# Altium PCB Kicker.PcbDoc (part 1 of 2)
Units mil, origin at the board's own origin, x right, y up, seen from the top; angles counter-clockwise.
Board outline 3322.83 x 1346.46 mil, 2 copper layers (Top Layer, Bottom Layer), stack 30.748 mil thick; 41 components, 31 nets, 116 pads, 28 vias.
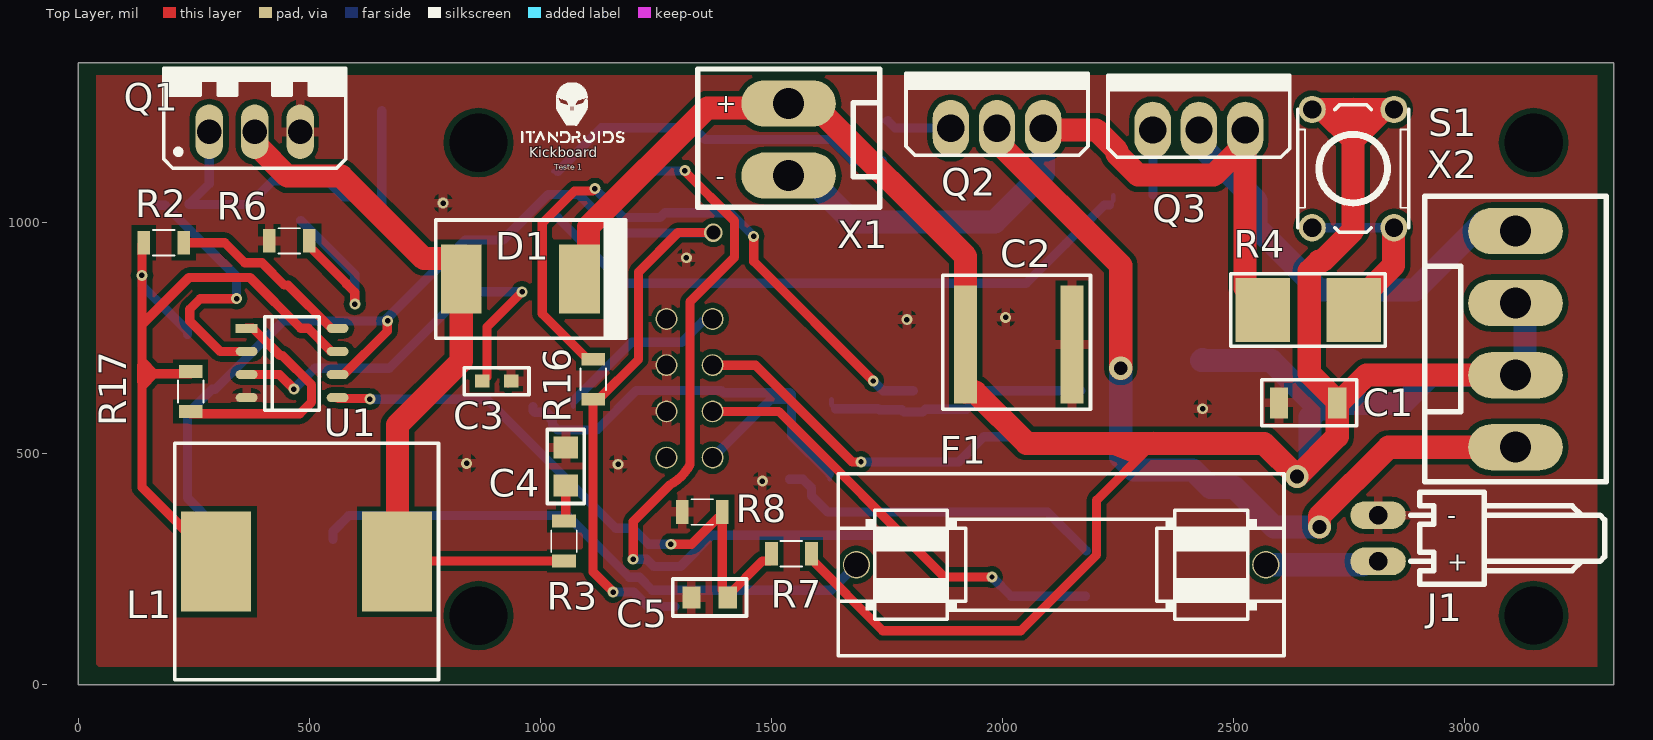
[diagram p0: Top Layer view]
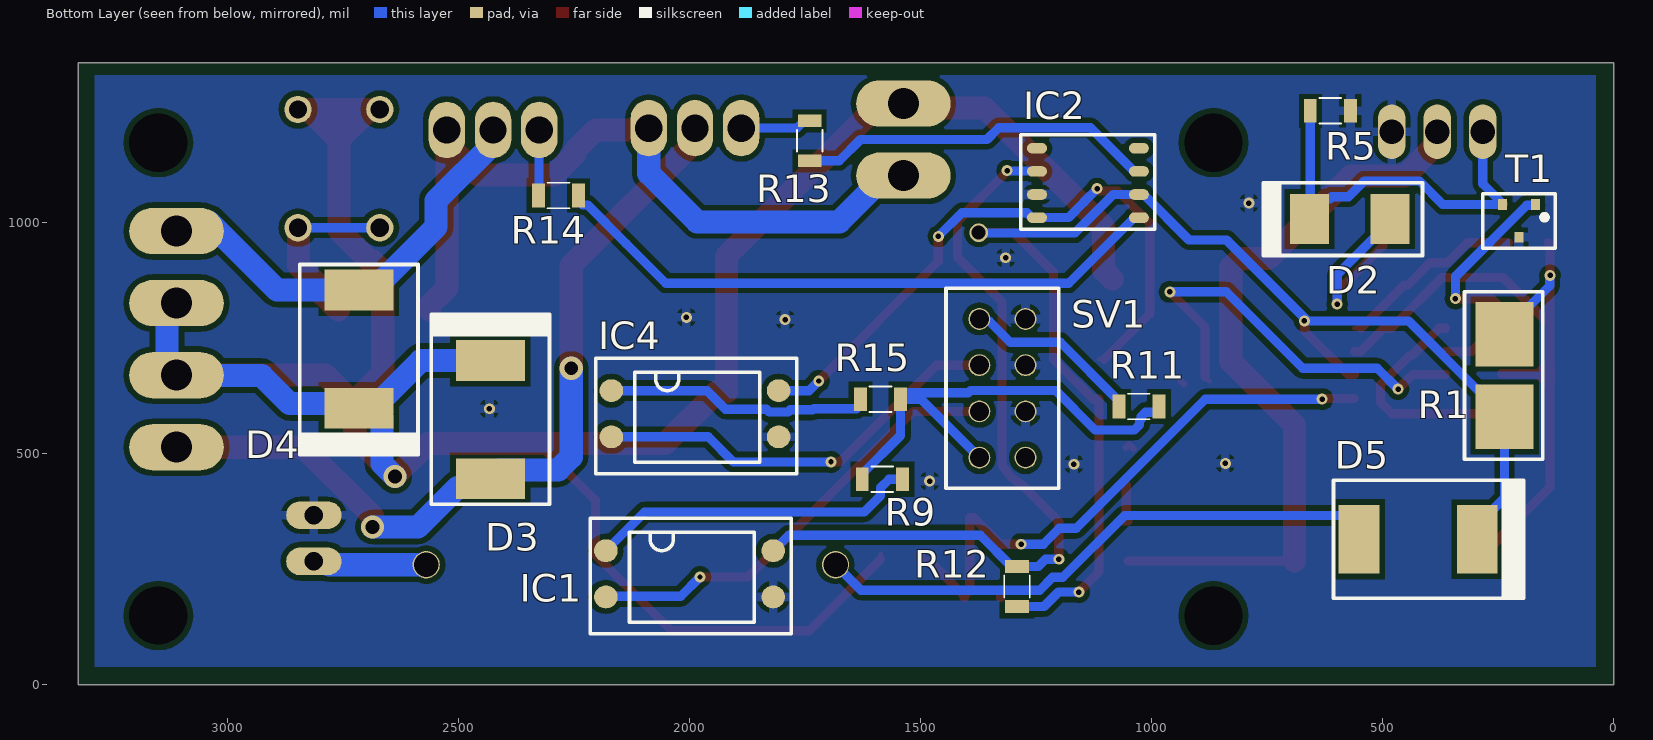
[diagram p1: Bottom Layer view, seen from below]
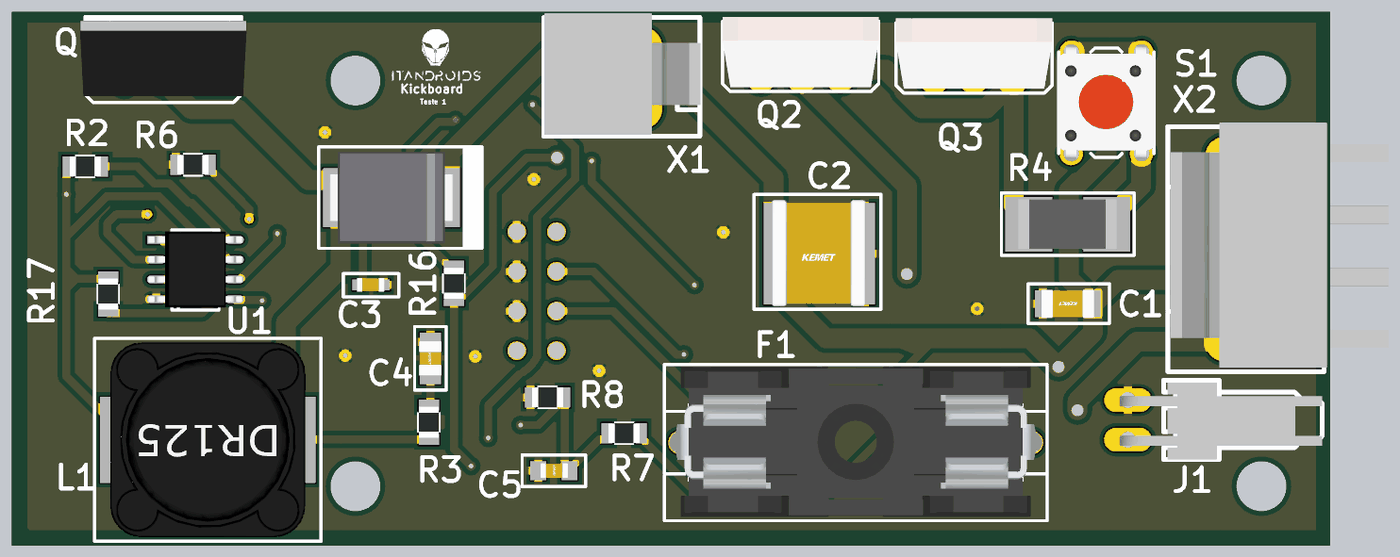
[diagram p2: 3D render of the assembled board from above, using the file's embedded part models]
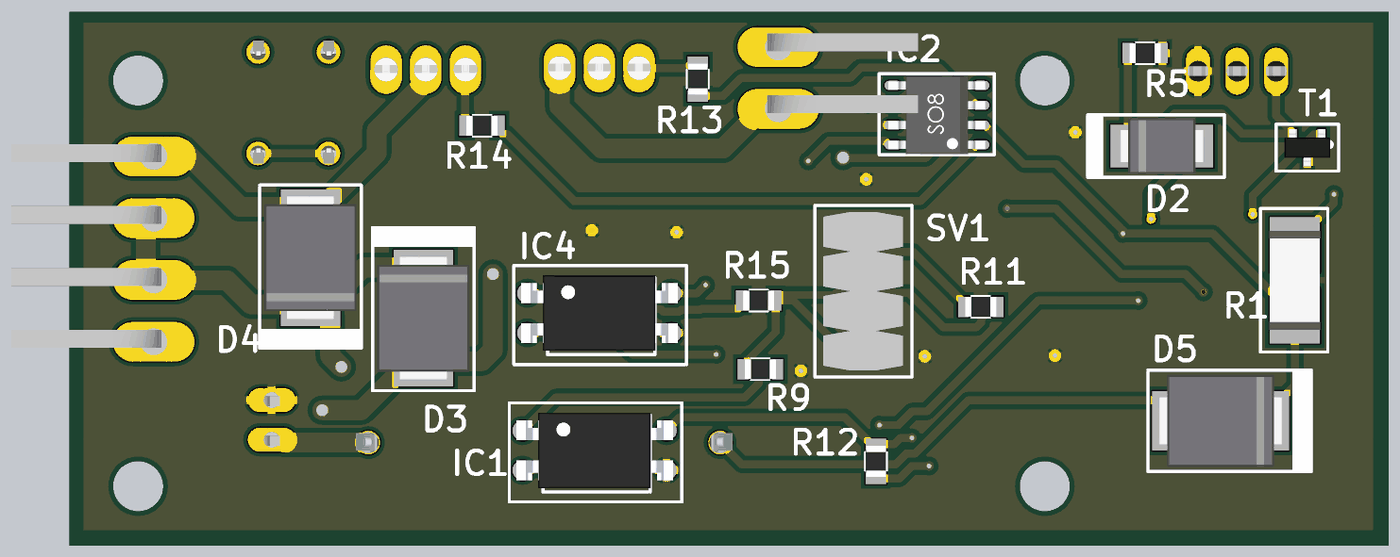
[diagram p3: 3D render of the assembled board from below, using the file's embedded part models]

## Layer stack, top to bottom
Top Solder: solder mask 0.4, Solder Resist, Dk 3.5
Top Layer: signal copper 1.378
Dieletric 1: prepreg 27.9921, PP-006, Dk 4.1
Bottom Layer: signal copper 1.378
Bottom Solder: solder mask 0.4, Solder Resist, Dk 3.5

## Board outline
0,0 0,1346.46 3322.83,1346.46 3322.83,0

## Design rules (kind name [scope] priority, off if disabled: settings)
Clearance [All] p1: gap=11.81 ignorepadtopadclearanceinfootprint=FALSE
DiffPairsRouting [All] p1: maxlimit=10 minlimit=10 mostfreqgap=10 substack1={F6E0959F-35FE-4660-A06D-27E5D69F85E3} toplayer_{f6e0959f-35fe-4660-a06d-27e5d69f85e3}_minwidth=15 toplayer_{f6e0959f-35fe-4660-a06d-27e5d69f85e3}_maxwidth=15 toplayer_{f6e0959f-35fe-4660-a06d-27e5d69f85e3}_prefwidth=15 bottomlayer_{f6e0959f-35fe-4660-a06d-27e5d69f85e3}_minwidth=15 bottomlayer_{f6e0959f-35fe-4660-a06d-27e5d69f85e3}_maxwidth=15 bottomlayer_{f6e0959f-35fe-4660-a06d-27e5d69f85e3}_prefwidth=15 toplayer_minwidth=15 toplayer_maxwidth=15 toplayer_prefwidth=15 bottomlayer_minwidth=15 bottomlayer_maxwidth=15 bottomlayer_prefwidth=15 substack2={2711AD71-F103-4CAD-93B6-FAE1FBF85523} toplayer_{2711ad71-f103-4cad-93b6-fae1fbf85523}_minwidth=15 toplayer_{2711ad71-f103-4cad-93b6-fae1fbf85523}_maxwidth=15 toplayer_{2711ad71-f103-4cad-93b6-fae1fbf85523}_prefwidth=15 bottomlayer_{2711ad71-f103-4cad-93b6-fae1fbf85523}_minwidth=15 bottomlayer_{2711ad71-f103-4cad-93b6-fae1fbf85523}_maxwidth=15 bottomlayer_{2711ad71-f103-4cad-93b6-fae1fbf85523}_prefwidth=15 maxuncoupledlength=500
PolygonConnect [All] p1: connectstyle=Relief reliefconductorwidth=20 reliefentries=4 polygonreliefangle="90 Angle" airgapwidth=10
RoomDefinition Sheet2 [InComponentClass('Sheet2')] p1 off: confinementstyle=ConfineIn formatcopy=TRUE lockcomponents=FALSE outline 3515.75,929.13 9535.75,929.13 9535.75,2019.13 3515.75,2019.13
RoomDefinition Sheet1 [InComponentClass('Sheet1')] p2 off: confinementstyle=ConfineIn formatcopy=TRUE lockcomponents=FALSE outline 3535.43,74.8 8335.43,74.8 8335.43,819.8 3535.43,819.8
RoutingVias [All] p1: holewidth=11.81 width=23.62 viastyle="Through Hole" minholewidth=11.81 minwidth=23.62 maxholewidth=11.81 maxwidth=23.62
SolderMaskExpansion [All] p1: expansion=4 istentingtop=FALSE
Width [All] p1: maxlimit=50 minlimit=10 preferedwidth=20 substack1={F6E0959F-35FE-4660-A06D-27E5D69F85E3} substack2={2711AD71-F103-4CAD-93B6-FAE1FBF85523}
29 further rules are at their usual default settings.

## Classes and differential pairs
component class Sheet2: C1 C2 C3 C4 C5 D1 D2 D5 F1 J1 L1 Q1 R1 R2 R3 R4 R5 R6 R7 R8 R17 S1 T1 U1
component class Sheet1: D3 D4 IC1 IC2 IC4 Q2 Q3 R9 R11 R12 R13 R14 R15 R16 SV1 X1 X2

## Components (designator, comment, footprint, x,y, rotation, side; value= is the part's Value field where it differs from the comment)
C1 "Cap_Cer_0.1u_250V_1206" CAP_CER_0.1U_250V_1206 2661.42,610.24 r180 top
C2 "Cap_Cer_1u_200V_2225" Cap_Cer_1u_200V_2225 2035.43,736.22 r0 top
C3 "Cap_Cer_1n_50V_0603" "Cap_Cer 1n_50V_0603" 905.51,657.48 r0 top
C4 "Cap_Cer_10nF_250V_0805" CAP_CER_10N_250V_0805 1055.12,472.44 r90 top
C5 "Cap_Cer_10n_50V_0603" Cap_Cer_10n_50V_0603 1366.14,188.98 r180 top
D1 "Diode_200V_3A_DO-214AB" D320 956.69,877.95 r180 top
D2 "Diode_30V_2A_DO_214AA" D130 571.26,1007.87 r180 bottom
D3 "Diode_200V_3A_DO-214AB" D320 2431.1,573.82 r270 bottom
D4 "Diode_200V_3A_DO-214AB" D320 2715.55,726.38 r90 bottom
D5 "Diode_200V_3A_DO-214AB" D320 423.23,314.96 r0 bottom
F1 "Fuseholder(Cartridge)" FuseHolder 2126.97,259.84 r0 top
IC1 "HCPL-817-300E" OPTOISOLATOR_5KV_TRANSISTOR_4SMD 2000,240.16 r180 bottom
IC2 "TC4426AEOA713" "CI DRIVER" 1248.03,1161.02 r180 bottom
IC4 "HCPL-817-300E" OPTOISOLATOR_5KV_TRANSISTOR_4SMD 1988.19,586.61 r180 bottom
J1 "CONN HEADER" "CONN HEADER R_A 2POS 2.54MM" 2812.99,367.16 r0 top
L1 "Ind_DR125_47uH_2A" DR125 494.09,266.73 r180 top
Q1 "IRF740APBF" To-220 381.89,1196.85 r0 top
Q2 "IRFSL4127PBF" TO-262 1988.19,1204.72 r0 top
Q3 "IRFSL4127PBF" TO-262 2425.2,1200.79 r0 top
R1 "RES_0.15R_2W_2512" R2512 236.22,669.29 r270 bottom
R2 "Res_47R_0805" 0805 185.04,956.69 r180 top
R3 "1k" Resistor_0805 1051.18,314.96 r270 top value=RC0805FR-071KL
R4 "3.3K OHMS 2512" RESISTOR_2512 2661.42,811.02 r180 top
R5 "1k" Resistor_0805 609.25,1242.12 r0 bottom value=RC0805FR-071KL
R6 "1k" Resistor_0805 452.76,960.63 r0 top value=RC0805FR-071KL
R7 "150 K" Resistor_0805 1547.24,283.46 r180 top value=RC0805FR-07220KL
R8 "Res_1.2K_0805_1%" 0805 1350.39,374.02 r0 top
R9 "390R" Resistor_0805 1578.74,444.88 r0 bottom value=1K
R11 "Res_1.2K_0805_1%" 0805 1027.56,602.36 r180 bottom
R12 "Res_1.2K_0805_1%" 0805 1291.34,212.6 r270 bottom
R13 "1k" Resistor_0805 1740.16,1173.23 r90 bottom value=RC0805FR-071KL
R14 "1k" Resistor_0805 2287.4,1059.06 r180 bottom value=RC0805FR-071KL
R15 "390R" Resistor_0805 1590.55,618.11 r180 bottom value=1K
R16 "Res_1.2K_0805_1%" 0805 1114.17,661.42 r270 top
R17 "1k" Resistor_0805 243.11,630.91 r90 top value=RC0805FR-071KL
S1 "B3F-1005" SWITCH_TACTILE_SPST-NO_0.05A_24V 2847.44,1245.08 r270 top
SV1 "90131-0764" "CONN HEADER VERT 8POS 2.54MM" 1322.83,641.73 r0 bottom
T1 "MMBT3906-7-F" SOT-23-3 204.99,1003.94 r0 bottom
U1 "MC34063EBD-TR" MC34063EBD-TR 364.33,771.46 r0 top
X1 "CONN HEADER" "CONN HEADER R_A 2POS 3.98MM" 1537.28,1179.88 r0 top
X2 "CONN HEADER" "CONN HEADER R_A 4POS 3.98MM" 3110.24,748.03 r0 top

## Footprints (in the part's own frame and the unit in brackets; to place one, negate y for a bottom-side part, rotate by r counter-clockwise, add the part's x,y. Pads: shape width x height; smd on the part's side, far side on the other; paste and mask are expansions set on the pad)
0805 [mm]
  rect 0.7x1.3 smd: 1(-1.1,0) 2(1.1,0)
  silkscreen extent -0.6,-0.7 0.6,0.7, body extent -1,-0.62 1,0.63, height 0.5
"Cap_Cer 1n_50V_0603" [mm]
  rect 0.8x0.7 smd: 1(-0.8,0) 2(0.8,0)
  silkscreen extent -1.78,-0.76 1.78,0.72, body extent -0.9,-0.42 0.85,0.45, height 1
CAP_CER_0.1U_250V_1206 [mm]
  rect 1x1.7 smd: 1(-1.6,0) 2(1.6,0)
  silkscreen extent -2.67,-1.27 2.54,1.27, body extent -1.7,-0.89 1.7,0.91, height 1.4
Cap_Cer_1u_200V_2225 [mil]
  rect 50x255.91 smd: 1(-115,0) 2(115,0)
  silkscreen extent -165,-140 155,150, body extent -120,-132 116,136, height 71
Cap_Cer_10n_50V_0603 [mm]
  rect 1x1.2 smd: 1(-1,0) 2(1,0)
  silkscreen extent -2.03,-1.02 2.03,1.02, body extent -0.9,-0.48 0.85,0.47, height 0.87
CAP_CER_10N_250V_0805 [mm]
  rect 1.2x1.35 smd: 1(-1.05,0) 2(1.05,0)
  silkscreen extent -2.03,-1.02 2.03,1.02, body extent -1.1,-0.72 1.1,0.73, height 0.95
"CI DRIVER" [mm]
  oval 1.1x0.584 smd: 1(0,0) 2(0,-1.27) 3(0,-2.54) 4(0,-3.81) 5(5.6,-3.81) 6(5.6,-2.54) 7(5.6,-1.27) 8(5.6,0)
  silkscreen extent -0.9,-4.45 6.48,0.75, body extent -0.31,-4.41 5.89,0.6, height 1.75
"CONN HEADER R_A 2POS 2.54MM" [mil] "Conn Wire to Board HDR 2 POS 2.54mm Solder RA Thru-Hole Bag"
  oval 120x60 hole 40.16: 1(0,0) 2(0,-100)
  silkscreen extent 70,-150 490,50, body extent -20,-150 489,44, height 263
"CONN HEADER R_A 2POS 3.98MM" [mm] "Connector Header Through Hole, Right Angle 2 position 0.156\" (3.96mm)"
  oval 5.2x2.54 hole 1.7: 1(0,1.98) 2(0,-1.98)
  silkscreen extent -5,-3.73 5,3.88, body extent -8.93,-3.63 5.04,4.14, height 15
"CONN HEADER R_A 4POS 3.98MM" [mm] "Connector Header Through Hole, Right Angle 4 position 0.156\" (3.96mm)"
  oval 5.2x2.54 hole 1.7: 1(0,-5.94) 2(0,-1.98) 3(0,1.98) 4(0,5.94)
  silkscreen extent -5,-7.85 5,7.85, body extent -4.82,-7.6 9.15,8.1, height 14.8
"CONN HEADER VERT 8POS 2.54MM" [mm]
  round 1.2 hole 1.05: 1(-1.27,3.81) 2(1.27,3.81) 3(-1.27,1.27) 4(1.27,1.27) 5(-1.27,-1.27) 6(1.27,-1.27) 7(-1.27,-3.81) 8(1.27,-3.81)
  silkscreen extent -3.1,-5.5 3.1,5.5, body extent -2.51,-5.08 2.57,5.08, height 5.4
D130 [mil]
  rect 85x107.99 smd: 1(-87.01,0) 2(87.01,0)
  silkscreen extent -187,-79 157,79, body extent -106,-71 106,71, height 91
D320 [mm]
  rect 2.25x3.79 smd: 1(-3.25,0) 2(3.25,0)
  silkscreen extent -5.8,-3.25 4.65,3.25, body extent -3.98,-2.95 3.97,2.95, height 2.32
DR125 [mm]
  rect 3.85x5.5 smd: 1(-4.975,0) 2(4.975,0)
  silkscreen extent -7.25,-6.5 7.25,6.5, body extent -6.25,-6.25 6.25,6.25, height 8.01
FuseHolder [mm]
  round 1.5 hole 1.35: 1(-11.25,0) 2(11.25,0)
  silkscreen extent -12.25,-5 12.25,5, body extent -12.05,-4.75 12.05,4.85, height 11.8
MC34063EBD-TR [mm]
  rect 1.2x0.5 smd: 1(0,0)
  oval 1.2x0.5 smd: 2(0,-1.27) 3(0,-2.54) 4(0,-3.81) 5(5,-3.81) 6(5,-2.54) 7(5,-1.27) 8(5,0)
  silkscreen extent 1,-4.5 4,0.64, body extent -0.5,-4.35 5.5,0.55, height 1.53
OPTOISOLATOR_5KV_TRANSISTOR_4SMD [mm]
  oval 1.3x1.25 smd: 1(-4.6,1.27) 2(-4.6,-1.27) 3(4.6,1.27) 4(4.6,-1.27)
  silkscreen extent -5.46,-3.3 5.59,3.05, body extent -5.01,-2.42 5.02,2.42, height 3.9
R2512 [mm]
  rect 3.55x3.2 smd: 1(-2.275,0) 2(2.275,0)
  silkscreen extent -4.6,-2.2 4.6,2.1, body extent -3.17,-1.63 3.18,1.63, height 0.58
Resistor_0805 [mm]
  rect 0.7x1.3 smd: 1(-1,0) 2(1.2,0)
  silkscreen extent -0.5,-0.7 0.7,0.7, body extent -0.9,-0.63 1.1,0.63, height 0.5
RESISTOR_2512 [mm]
  rect 3x3.5 smd: 1(-2.5,0) 2(2.5,0)
  silkscreen extent -4.25,-2 4.25,2, body extent -3.13,-1.6 3.17,1.6, height 0.59
SOT-23-3 [mm]
  rect 0.5x0.6 smd: B(-0.9,-0.9) C(0,0.9) E(0.9,-0.9)
  silkscreen extent -2,-1.5 2,1.5, body extent -1.46,-1.18 1.46,1.16, height 1.07
SWITCH_TACTILE_SPST-NO_0.05A_24V [mm]
  round 1.5 hole 1: 1(0,0) 2(0,-4.5) 3(6.5,0) 4(6.5,-4.5)
  silkscreen extent -0.25,-5.3 6.75,0.8, body extent -0.75,-5.38 7.15,0.83, height 7
To-220 [mm]
  oval 1.524x3 hole 1.33: D(0,0) G(-2.5,0) S(2.5,0)
  silkscreen extent -5,-2 5,3.5, body extent -5.33,-1.61 5.34,3.22, height 22.66
TO-262 [mm]
  oval 2x3.1 hole 1.5: D(0,0) G(-2.54,0) S(2.54,0)
  silkscreen extent -5,-1.5 5,3, body extent -5,-1.22 5,3.29, height 15.15

## Part data
C1: "KEMET - C1206C104KARACTU - CAP, 0.1µF, 250V, 10%, X7R, 1206", Capacitance=100nF, Case Code (Imperial)=1206, Case Code (Metric)=3216, Dielectric=X7R, Dielectric Material=Ceramic, Manufacturer=KEMET, Manufacturer Part Number=C1206C104KARACTU, Max Operating Temperature=125°C, Min Operating Temperature=-55°C, Package Quantity=2500, Tolerance=10%, Voltage=250V, Case/Package=1206, Category="Ceramic Capacitors", ComponentLink1Description=https://datasheet.ciiva.com/146/kem-c1002-x7r-smd-146896.pdf?src-supplier=Digi-Key, ComponentLink1URL=https://datasheet.ciiva.com/146/kem-c1002-x7r-smd-146896.pdf?src-supplier=Digi-Key, ComponentLink2Description=https://datasheet.ciiva.com/146/kem-c1002-x7r-smd-146897.pdf?src-supplier=Digi-Key, ComponentLink2URL=https://datasheet.ciiva.com/146/kem-c1002-x7r-smd-146897.pdf?src-supplier=Digi-Key, ComponentLink3Description=https://datasheet.ciiva.com/146/kem-c1002-x7r-smd-146898.pdf?src-supplier=Digi-Key, ComponentLink3URL=https://datasheet.ciiva.com/146/kem-c1002-x7r-smd-146898.pdf?src-supplier=Digi-Key, ComponentLink4Description=https://datasheet.ciiva.com/28533/1918693-28533237.pdf?src-supplier=Element14, ComponentLink4URL=https://datasheet.ciiva.com/28533/1918693-28533237.pdf?src-supplier=Element14, ComponentLink5Description=https://datasheet.ciiva.com/14588/70096117-14588278.pdf?src-supplier=Allied+Electronics, ComponentLink5URL=https://datasheet.ciiva.com/14588/70096117-14588278.pdf?src-supplier=Allied+Electronics, ComponentLink6Description=https://datasheet.ciiva.com/6094/kem-c1002-x7r-smd-6094138.pdf?src-supplier=Farnell, ComponentLink6URL=https://datasheet.ciiva.com/6094/kem-c1002-x7r-smd-6094138.pdf?src-supplier=Farnell, Contact Plating=Tin,Matte, Depth=1.6mm, Dissipation Factor=2.5%, Height=1.25mm, Length=3.2mm, Mount="Surface Mount,PCB", Number of Pins=2, Packaging="Tape and Reel", Pricing 1="1=0,40000, 10=0,27700, 100=0,16620, 500=0,12466, 1000=0,10527 (USD)", Radiation Hardening=No, REACH SVHC="No SVHC", RoHS=Yes, Stock 1=71903, Supplier 1=Digi-Key, Termination=SMD/SMT, Thickness=0.055inch, Voltage Rating=250V, Voltage Rating (DC)=250V, Width=0.063inch
C2: "CAP CER 1UF 200V X7R 2225", Capacitance=1uF, Case Code (Imperial)=2225, Case Code (Metric)=5763, Dielectric=X7R, Manufacturer="Vishay Vitramon", Manufacturer Part Number=VJ2225Y105KXCAT, Max Operating Temperature=125°C, Min Operating Temperature=-55°C, Package Quantity=1, Tolerance=10%, Voltage Rating=200V, Case/Package=2225, Category="Ceramic Capacitors", ComponentLink1Description=https://datasheet.ciiva.com/149/vjcommercialseries-149648.pdf?src-supplier=Digi-Key, ComponentLink1URL=https://datasheet.ciiva.com/149/vjcommercialseries-149648.pdf?src-supplier=Digi-Key, ComponentLink2Description=https://datasheet.ciiva.com/149/vjcommercialseries-149649.pdf?src-supplier=Digi-Key, ComponentLink2URL=https://datasheet.ciiva.com/149/vjcommercialseries-149649.pdf?src-supplier=Digi-Key, ComponentLink3Description=https://datasheet.ciiva.com/15165/getdatasheetpartid-44670-15165222.pdf?src-supplier=Verical, ComponentLink3URL=https://datasheet.ciiva.com/15165/getdatasheetpartid-44670-15165222.pdf?src-supplier=Verical, ComponentLink4Description=https://datasheet.ciiva.com/149/vjcommercialseries-149647.pdf?src-supplier=Digi-Key, ComponentLink4URL=https://datasheet.ciiva.com/149/vjcommercialseries-149647.pdf?src-supplier=Digi-Key, Depth=6.35mm, Height=2.18mm, Lead Free="Lead Free", Length=5.59mm, Mount="Surface Mount", Packaging="Tape and Reel", Pricing 1="1=2,15000, 10=1,74000, 100=1,32860 (USD)", Radiation Hardening=No, RoHS=Yes, Stock 1=12164, Supplier 1=Digi-Key, Termination=SMD/SMT, Thickness=0.086inch, Voltage Rating (DC)=200V, Width=0.25inch
C3: "MURATA - GRM188R71H102KA01D - CAP, MLCC, X7R, 1NF, 50V, 0603, REEL", Capacitance=1nF, Case Code (Imperial)=0603, Case Code (Metric)=1608, Dielectric=X7R, Dielectric Material=Ceramic, Insulation Resistance=10GR, Manufacturer=Murata, Manufacturer Part Number=GRM188R71H102KA01D, Max Operating Temperature=125°C, Min Operating Temperature=-55°C, Package Quantity=1, Tolerance=10%, Voltage=50V, Case/Package=0603, Category="Ceramic Capacitors", ComponentLink1Description=https://datasheet.ciiva.com/19476/1857575-19476358.pdf?src-supplier=Jameco, ComponentLink1URL=https://datasheet.ciiva.com/19476/1857575-19476358.pdf?src-supplier=Jameco, ComponentLink2Description=https://datasheet.ciiva.com/29202/451684-da-01-en-vs-kondensator-0603-29202035.pdf?src-supplier=Conrad, ComponentLink2URL=https://datasheet.ciiva.com/29202/451684-da-01-en-vs-kondensator-0603-29202035.pdf?src-supplier=Conrad, ComponentLink3Description=https://datasheet.ciiva.com/14116/grmseries-highdielectrictype-eng-14116630.pdf?src-supplier=Distrelec, ComponentLink3URL=https://datasheet.ciiva.com/14116/grmseries-highdielectrictype-eng-14116630.pdf?src-supplier=Distrelec, ComponentLink4Description=https://datasheet.ciiva.com/16311/product-16311526.pdf?src-supplier=Future+Electronics, ComponentLink4URL=https://datasheet.ciiva.com/16311/product-16311526.pdf?src-supplier=Future+Electronics, ComponentLink5Description=https://datasheet.ciiva.com/129/partnumbering-e-01-129816.pdf?src-supplier=Digi-Key, ComponentLink5URL=https://datasheet.ciiva.com/129/partnumbering-e-01-129816.pdf?src-supplier=Digi-Key, ComponentLink6Description=https://datasheet.ciiva.com/129/partnumbering-e-01-129817.pdf?src-supplier=Digi-Key, ComponentLink6URL=https://datasheet.ciiva.com/129/partnumbering-e-01-129817.pdf?src-supplier=Digi-Key, ComponentLink7Description=https://datasheet.ciiva.com/129/partnumbering-e-01-129818.pdf?src-supplier=Digi-Key, ComponentLink7URL=https://datasheet.ciiva.com/129/partnumbering-e-01-129818.pdf?src-supplier=Digi-Key, ComponentLink8Description=https://datasheet.ciiva.com/5424/product-5424794.pdf?src-supplier=Mouser, ComponentLink8URL=https://datasheet.ciiva.com/5424/product-5424794.pdf?src-supplier=Mouser, ComponentLink9Description=https://datasheet.ciiva.com/28534/1769893-28534220.pdf?src-supplier=Element14, ComponentLink9URL=https://datasheet.ciiva.com/28534/1769893-28534220.pdf?src-supplier=Element14, ComponentLink10Description=https://datasheet.ciiva.com/46441/4360-46441324.pdf?src-supplier=Element14, ComponentLink10URL=https://datasheet.ciiva.com/46441/4360-46441324.pdf?src-supplier=Element14, ComponentLink11Description=https://datasheet.ciiva.com/48428/nmgrm-data-en-48428588.pdf?src-supplier=Distrelec, ComponentLink11URL=https://datasheet.ciiva.com/48428/nmgrm-data-en-48428588.pdf?src-supplier=Distrelec, ComponentLink12Description=https://datasheet.ciiva.com/7937/1784410-7937653.pdf?src-supplier=Element14, ComponentLink12URL=https://datasheet.ciiva.com/7937/1784410-7937653.pdf?src-supplier=Element14, ComponentLink13Description=https://datasheet.ciiva.com/48428/nmgrm-data-en-48428589.pdf?src-supplier=Distrelec, ComponentLink13URL=https://datasheet.ciiva.com/48428/nmgrm-data-en-48428589.pdf?src-supplier=Distrelec, Depth=0.8mm, Height=0.8mm, Lead Free="Lead Free", Length=1.6mm, Material=Ceramic, Mount="Surface Mount", Number of Pins=2, Packaging="Tape and Reel", Pricing 1="4000=0,00310 (USD)", REACH SVHC="No SVHC", RoHS=Yes, Stock 1=2496000, Supplier 1="Future Electronics", Termination=SMD/SMT, Thickness=0.035inch, Voltage Rating=50V, Voltage Rating (DC)=50V, Width=0.031inch
C4: "Capacitors; Ceramic SMT; Tip and Ring; .010uF 250V; 10%; X7R; TR", Capacitance=10nF, Case Code (Imperial)=0805, Case Code (Metric)=2012, Dielectric=X7R, Dielectric Material=Ceramic, Manufacturer=KEMET, Manufacturer Part Number=C0805C103KARACTU, Max Operating Temperature=125°C, Min Operating Temperature=-55°C, Package Quantity=1, Tolerance=10%, Voltage=250V, Case/Package=0805, Category="Ceramic Capacitors", ComponentLink1Description=https://datasheet.ciiva.com/26923/getdatasheetpartid-151914-26923959.pdf?src-supplier=Verical, ComponentLink1URL=https://datasheet.ciiva.com/26923/getdatasheetpartid-151914-26923959.pdf?src-supplier=Verical, ComponentLink2Description=https://datasheet.ciiva.com/145/kem-c1002-x7r-smd-145393.pdf?src-supplier=Digi-Key, ComponentLink2URL=https://datasheet.ciiva.com/145/kem-c1002-x7r-smd-145393.pdf?src-supplier=Digi-Key, ComponentLink3Description=https://datasheet.ciiva.com/145/kem-c1002-x7r-smd-145394.pdf?src-supplier=Digi-Key, ComponentLink3URL=https://datasheet.ciiva.com/145/kem-c1002-x7r-smd-145394.pdf?src-supplier=Digi-Key, ComponentLink4Description=https://datasheet.ciiva.com/145/kem-c1002-x7r-smd-145395.pdf?src-supplier=Digi-Key, ComponentLink4URL=https://datasheet.ciiva.com/145/kem-c1002-x7r-smd-145395.pdf?src-supplier=Digi-Key, ComponentLink5Description=https://datasheet.ciiva.com/22700/1851736-22700520.pdf?src-supplier=Element14, ComponentLink5URL=https://datasheet.ciiva.com/22700/1851736-22700520.pdf?src-supplier=Element14, Contact Plating=Tin,Matte, Depth=1.2mm, Dissipation Factor=10%, Height=0.78mm, Lead Pitch=0.75mm, Length=2mm, Mount="Surface Mount,PCB", Number of Pins=2, Packaging="Tape and Reel", Pricing 1="1=0,20000, 10=0,13900, 100=0,07020, 500=0,04802, 1000=0,04248 (USD)", Radiation Hardening=No, REACH SVHC="No SVHC", RoHS=Yes, Stock 1=136764, Supplier 1=Digi-Key, Termination=SMD/SMT, Thickness=0.035inch, Voltage Rating=250V, Voltage Rating (DC)=250V, Width=0.049inch
C5: "Capacitor 10 nF 50 VDC 0603", Capacitance=10nF, Case Code (Imperial)=0603, Case Code (Metric)=1608, Dielectric=X7R, Dielectric Material=Ceramic, Insulation Resistance=10GR, Manufacturer=Murata, Manufacturer Part Number=GRM188R71H103KA01D, Max Operating Temperature=125°C, Min Operating Temperature=-55°C, Package Quantity=1, Tolerance=10%, Voltage=50V, Case/Package=0603, Category="Ceramic Capacitors", ComponentLink1Description=https://datasheet.ciiva.com/129/product-129872.pdf?src-supplier=Digi-Key, ComponentLink1URL=https://datasheet.ciiva.com/129/product-129872.pdf?src-supplier=Digi-Key, ComponentLink2Description=https://datasheet.ciiva.com/11786/0900766b8003061f-11786516.pdf?src-supplier=RSComponents, ComponentLink2URL=https://datasheet.ciiva.com/11786/0900766b8003061f-11786516.pdf?src-supplier=RSComponents, ComponentLink3Description=https://datasheet.ciiva.com/29202/451715-da-01-en-vs-kondensator-0603-29202047.pdf?src-supplier=Conrad, ComponentLink3URL=https://datasheet.ciiva.com/29202/451715-da-01-en-vs-kondensator-0603-29202047.pdf?src-supplier=Conrad, ComponentLink4Description=https://datasheet.ciiva.com/129/partnumbering-e-01-129870.pdf?src-supplier=Digi-Key, ComponentLink4URL=https://datasheet.ciiva.com/129/partnumbering-e-01-129870.pdf?src-supplier=Digi-Key, ComponentLink5Description=https://datasheet.ciiva.com/48428/nmgrm-data-en-48428590.pdf?src-supplier=Distrelec, ComponentLink5URL=https://datasheet.ciiva.com/48428/nmgrm-data-en-48428590.pdf?src-supplier=Distrelec, ComponentLink6Description=https://datasheet.ciiva.com/129/partnumbering-e-01-129871.pdf?src-supplier=Digi-Key, ComponentLink6URL=https://datasheet.ciiva.com/129/partnumbering-e-01-129871.pdf?src-supplier=Digi-Key, ComponentLink7Description=https://datasheet.ciiva.com/48428/nmgrm-data-en-48428591.pdf?src-supplier=Distrelec, ComponentLink7URL=https://datasheet.ciiva.com/48428/nmgrm-data-en-48428591.pdf?src-supplier=Distrelec, ComponentLink8Description=https://datasheet.ciiva.com/7937/4360-7937654.pdf?src-supplier=Element14, ComponentLink8URL=https://datasheet.ciiva.com/7937/4360-7937654.pdf?src-supplier=Element14, ComponentLink9Description=https://datasheet.ciiva.com/7937/1747461-7937655.pdf?src-supplier=Element14, ComponentLink9URL=https://datasheet.ciiva.com/7937/1747461-7937655.pdf?src-supplier=Element14, ComponentLink10Description=https://datasheet.ciiva.com/7937/1747461-7937656.pdf?src-supplier=Element14, ComponentLink10URL=https://datasheet.ciiva.com/7937/1747461-7937656.pdf?src-supplier=Element14, ComponentLink11Description=https://datasheet.ciiva.com/28534/1769893-28534235.pdf?src-supplier=Element14, ComponentLink11URL=https://datasheet.ciiva.com/28534/1769893-28534235.pdf?src-supplier=Element14, Depth=0.8mm, Height=0.8mm, Lead Free="Lead Free", Length=1.6mm, Material=Ceramic, Mount="Surface Mount", Number of Pins=2, Packaging="Tape and Reel", Pricing 1="4000=0,01810, 8000=0,01790, 24000=0,01540, 100000=0,01510 (USD)", REACH SVHC=Unknown, RoHS=Yes, Stock 1=472000, Supplier 1=Arrow, Termination=SMD/SMT, Thickness=0.035inch, Voltage Rating=50V, Voltage Rating (DC)=50V, Width=0.031inch
D1 D3 D4 D5: "ON SEMICONDUCTOR - MBRS3201T3G - Schottky Rectifier, 200 V, 3 A, Single, DO-214AB (SMC), 2 Pins, 840 mV", Average Rectified Current=3A, Case/Package=SMC, Forward Voltage=840mV, Manufacturer="ON Semiconductor", Manufacturer Part Number=MBRS3201T3G, Max Forward Surge Current (Ifsm)=100A, Max Operating Temperature=150°C, Max Repetitive Reverse Voltage (Vrrm)=200V, Max Reverse Leakage Current=5uA, Min Operating Temperature=-55°C, Package Quantity=2500, Supplier Part Number 1=MBRS3201T3GOSCT-ND, Category="Schottky Diodes", ComponentLink1Description=https://datasheet.ciiva.com/923/mbrs3201t3-d-923290.pdf?src-supplier=Avnet, ComponentLink1URL=https://datasheet.ciiva.com/923/mbrs3201t3-d-923290.pdf?src-supplier=Avnet, ComponentLink2Description=https://datasheet.ciiva.com/22659/1708281-22659072.pdf?src-supplier=Element14, ComponentLink2URL=https://datasheet.ciiva.com/22659/1708281-22659072.pdf?src-supplier=Element14, ComponentLink3Description=https://datasheet.ciiva.com/916/mbrs3201t3-916256.pdf?src-supplier=Digi-Key, ComponentLink3URL=https://datasheet.ciiva.com/916/mbrs3201t3-916256.pdf?src-supplier=Digi-Key, ComponentLink4Description=https://datasheet.ciiva.com/26912/getdatasheetpartid-105192-26912741.pdf?src-supplier=Verical, ComponentLink4URL=https://datasheet.ciiva.com/26912/getdatasheetpartid-105192-26912741.pdf?src-supplier=Verical, ComponentLink5Description=https://datasheet.ciiva.com/25948/mbrs3201t3-d-25948165.pdf?src-supplier=Avnet+Europe, ComponentLink5URL=https://datasheet.ciiva.com/25948/mbrs3201t3-d-25948165.pdf?src-supplier=Avnet+Europe, ComponentLink6Description=https://datasheet.ciiva.com/8294/mbrs3201t3-d-8294973.pdf?src-supplier=Avnet, ComponentLink6URL=https://datasheet.ciiva.com/8294/mbrs3201t3-d-8294973.pdf?src-supplier=Avnet, ComponentLink7Description=https://datasheet.ciiva.com/916/mbrs3201t3-d-916255.pdf?src-supplier=Digi-Key, ComponentLink7URL=https://datasheet.ciiva.com/916/mbrs3201t3-d-916255.pdf?src-supplier=Digi-Key, ComponentLink8Description=https://datasheet.ciiva.com/916/mbrs3201t3-d-916257.pdf?src-supplier=Digi-Key, ComponentLink8URL=https://datasheet.ciiva.com/916/mbrs3201t3-d-916257.pdf?src-supplier=Digi-Key, ComponentLink9Description=https://datasheet.ciiva.com/16393/mbrs3201t3-d-16393647.pdf?src-supplier=Future+Electronics, ComponentLink9URL=https://datasheet.ciiva.com/16393/mbrs3201t3-d-16393647.pdf?src-supplier=Future+Electronics, Contact Plating=Tin,Matte, Current Rating=3A, Element Configuration=Single, Forward Current=3A, Halogen Free="Halogen Free", Height=2.26mm, Lead Free="Lead Free", Length=7.11mm, Max Reverse Voltage (DC)=200V, Max Surge Current=100A, Number of Pins=2, Output Current=3A, Packaging="Tape and Reel", Peak Non-Repetitive Surge Current=100A, Peak Reverse Current=5uA, Polarity=Standard, Pricing 1="1=0,60000, 10=0,53200, 25=0,49960, 100=0,36270, 250=0,34980, 500=0,30306, 1000=0,25792 (USD)", Radiation Hardening=No, REACH SVHC="No SVHC", Recovery Time=35ns, Reverse Recovery Time=35ns, RoHS=Yes, Stock 1=6509, Supplier 1=Digi-Key, Voltage Rating (DC)=200V, Width=6.1mm
D2: "ON SEMICONDUCTOR - MBRS130LT3G - Rectifier Diode, Single, 30 V, 2 A, DO-214AA, 2, 395 mV RoHS Compliant: Yes", Average Rectified Current=2A, Case/Package=SMB, Current Rating=1A, Forward Voltage=395mV, Manufacturer="ON Semiconductor", Manufacturer Part Number=MBRS130LT3G, Max Forward Surge Current (Ifsm)=40A, Max Operating Temperature=125°C, Max Repetitive Reverse Voltage (Vrrm)=30V, Max Reverse Leakage Current=1mA, Min Operating Temperature=-65°C, Package Quantity=1, Supplier Part Number 1=MBRS130LT3GOSCT-ND, Category="Schottky Diodes", ComponentLink1Description=https://datasheet.ciiva.com/5763/mbrs130lt3-d-5763008.pdf?src-supplier=Farnell, ComponentLink1URL=https://datasheet.ciiva.com/5763/mbrs130lt3-d-5763008.pdf?src-supplier=Farnell, ComponentLink2Description=https://datasheet.ciiva.com/915/mbrs130lt3-d-915698.pdf?src-supplier=Digi-Key, ComponentLink2URL=https://datasheet.ciiva.com/915/mbrs130lt3-d-915698.pdf?src-supplier=Digi-Key, ComponentLink3Description=https://datasheet.ciiva.com/27050/865899-27050530.pdf?src-supplier=Jameco, ComponentLink3URL=https://datasheet.ciiva.com/27050/865899-27050530.pdf?src-supplier=Jameco, ComponentLink4Description=https://datasheet.ciiva.com/22659/1708275-22659062.pdf?src-supplier=Element14, ComponentLink4URL=https://datasheet.ciiva.com/22659/1708275-22659062.pdf?src-supplier=Element14, ComponentLink5Description=https://datasheet.ciiva.com/915/mbrs130lt3-d-915699.pdf?src-supplier=Digi-Key, ComponentLink5URL=https://datasheet.ciiva.com/915/mbrs130lt3-d-915699.pdf?src-supplier=Digi-Key, ComponentLink6Description=https://datasheet.ciiva.com/915/mbrs130lt3-d-915700.pdf?src-supplier=Digi-Key, ComponentLink6URL=https://datasheet.ciiva.com/915/mbrs130lt3-d-915700.pdf?src-supplier=Digi-Key, ComponentLink7Description=https://datasheet.ciiva.com/7962/mbrs130lt3-d-7962810.pdf?src-supplier=Element14, ComponentLink7URL=https://datasheet.ciiva.com/7962/mbrs130lt3-d-7962810.pdf?src-supplier=Element14, ComponentLink8Description=https://datasheet.ciiva.com/25950/mbrs130lt3-d-25950250.pdf?src-supplier=Avnet+Europe, ComponentLink8URL=https://datasheet.ciiva.com/25950/mbrs130lt3-d-25950250.pdf?src-supplier=Avnet+Europe, ComponentLink9Description=https://datasheet.ciiva.com/16363/mbrs130lt3-d-16363355.pdf?src-supplier=Future+Electronics, ComponentLink9URL=https://datasheet.ciiva.com/16363/mbrs130lt3-d-16363355.pdf?src-supplier=Future+Electronics, Contact Plating=Tin,Matte, Element Configuration=Single, Forward Current=2A, Halogen Free="Halogen Free", Height=0.09inch, Lead Free="Lead Free", Length=0.181inch, Max Reverse Voltage (DC)=30V, Max Surge Current=40A, Number of Pins=2, Output Current=1A, Packaging="Tape and Reel", Peak Non-Repetitive Surge Current=40A, Peak Reverse Current=1mA, Polarity=Standard, Pricing 1="1=0,47000, 10=0,34900, 25=0,30520, 100=0,16570, 250=0,16480, 500=0,13516, 1000=0,10028 (USD)", Radiation Hardening=No, REACH SVHC="No SVHC", RoHS=Yes, Supplier 1=Digi-Key, Termination=SMD/SMT, Voltage Rating (DC)=30V, Width=0.156inch
F1: "Fuse Holder 10A 500VDC Solder Pin Through Hole Bulk Cartridge", Color=Black, Current Rating=10A, Flammability Rating="UL94 V-0", Insulation Resistance=10MR, Manufacturer=Schurter, Manufacturer Part Number=00318201, Max Operating Temperature=85°C, Min Operating Temperature=-40°C, Package Quantity=100, Voltage=500V, Voltage Rating=250V, Approvals=UL,CSA,IEC,EN, Body Material=Thermoplastic, Category=Fuses, ComponentLink1Description=https://datasheet.ciiva.com/3014/typ-ogn-3014480.pdf?src-supplier=Avnet, ComponentLink1URL=https://datasheet.ciiva.com/3014/typ-ogn-3014480.pdf?src-supplier=Avnet, ComponentLink2Description=https://datasheet.ciiva.com/3014/typ-ogn-3014480.pdf?src-supplier=Mouser, ComponentLink2URL=https://datasheet.ciiva.com/3014/typ-ogn-3014480.pdf?src-supplier=Mouser, ComponentLink3Description=https://datasheet.ciiva.com/16215/typ-ogn-16215099.pdf?src-supplier=Onlinecomponents.com, ComponentLink3URL=https://datasheet.ciiva.com/16215/typ-ogn-16215099.pdf?src-supplier=Onlinecomponents.com, ComponentLink4Description=https://datasheet.ciiva.com/1269/1842496-1269251.pdf?src-supplier=Element14, ComponentLink4URL=https://datasheet.ciiva.com/1269/1842496-1269251.pdf?src-supplier=Element14, ComponentLink5Description=https://datasheet.ciiva.com/16203/typ-ogn-16203626.pdf?src-supplier=Future+Electronics, ComponentLink5URL=https://datasheet.ciiva.com/16203/typ-ogn-16203626.pdf?src-supplier=Future+Electronics, ComponentLink6Description=https://datasheet.ciiva.com/16463/typ-ogn-16463850.pdf?src-supplier=Avnet+Asia, ComponentLink6URL=https://datasheet.ciiva.com/16463/typ-ogn-16463850.pdf?src-supplier=Avnet+Asia, ComponentLink7Description=https://datasheet.ciiva.com/25893/typ-ogn-25893934.pdf?src-supplier=Avnet+Europe, ComponentLink7URL=https://datasheet.ciiva.com/25893/typ-ogn-25893934.pdf?src-supplier=Avnet+Europe, ComponentLink8Description=https://datasheet.ciiva.com/15188/getdatasheetpartid-392104-15188042.pdf?src-supplier=Verical, ComponentLink8URL=https://datasheet.ciiva.com/15188/getdatasheetpartid-392104-15188042.pdf?src-supplier=Verical, Contact Material="Copper Alloy,Tin", Contact Plating=Tin, Depth=10.8mm, Fuse Current=10A, Illumination Type=Illuminated, Lead Free="Lead Free", Length=25mm, Material=Thermoplastic,Tin, Mount="PCB,Through Hole", Number of Circuits=1, Number of Poles=1, Orientation=Horizontal, Packaging=Bulk, Pricing 1="1=0,91000, 50=0,67600, 100=0,60800, 500=0,45900, 1000=0,34080 (USD)", Radiation Hardening=No, REACH SVHC="No SVHC", RoHS=Yes, Stock 1=26932, Supplier 1=Digi-Key, Termination="PC Pin", Voltage Rating (AC)=500V, Voltage Rating (DC)=500V, Weight=0.059966oz
IC1 IC4: "OPTOISOLATOR 5KV TRANSISTOR 4SMD", Case/Package=SMD/SMT, Collector Emitter Saturation Voltage=200mV, Collector Emitter Voltage (VCEO)=35V, Current Transfer Ratio=600%, Forward Current=50mA, Forward Voltage=1.4V, Input Current=20mA, Isolation Voltage=5kV, Manufacturer="Broadcom Avago", Max Operating Temperature=100°C, Max Output Voltage=70V, Max Power Dissipation=200mW, Min Operating Temperature=-30°C, Package Quantity=100, Reverse Breakdown Voltage=6V, Approvals=UL,CSA,VDE, Category=Optocouplers, ComponentLink1Description=https://datasheet.ciiva.com/14169/av02-0265en-14169345.pdf?src-supplier=Distrelec, ComponentLink1URL=https://datasheet.ciiva.com/14169/av02-0265en-14169345.pdf?src-supplier=Distrelec, ComponentLink2Description=https://datasheet.ciiva.com/11771/0900766b80db8749-11771859.pdf?src-supplier=RSComponents, ComponentLink2URL=https://datasheet.ciiva.com/11771/0900766b80db8749-11771859.pdf?src-supplier=RSComponents, ComponentLink3Description=https://datasheet.ciiva.com/15118/getdatasheetpartid-148838-15118837.pdf?src-supplier=Verical, ComponentLink3URL=https://datasheet.ciiva.com/15118/getdatasheetpartid-148838-15118837.pdf?src-supplier=Verical, ComponentLink4Description=https://datasheet.ciiva.com/29301/140230-da-01-en-fototransistor-optokoppler-hcpl-817-300e-29301503.pdf?src-supplier=Conrad, ComponentLink4URL=https://datasheet.ciiva.com/29301/140230-da-01-en-fototransistor-optokoppler-hcpl-817-300e-29301503.pdf?src-supplier=Conrad, ComponentLink5Description=https://datasheet.ciiva.com/4702/v02-0265en-106799-4702250.pdf?src-supplier=Mouser, ComponentLink5URL=https://datasheet.ciiva.com/4702/v02-0265en-106799-4702250.pdf?src-supplier=Mouser, ComponentLink6Description=https://datasheet.ciiva.com/8065/1266126-8065797.pdf?src-supplier=Element14, ComponentLink6URL=https://datasheet.ciiva.com/8065/1266126-8065797.pdf?src-supplier=Element14, Contact Plating=Tin,Matte, Fall Time=18000ns, Lead Free="Lead Free", Manufacturer Part Number=HCPL-817-300E, Max Collector Current=50mA, Max Input Current=50mA, Mount="Surface Mount", Number of Channels=1, Number of Circuits=1, Number of Elements=1, Number of Pins=4, Output Current per Channel=50mA, Packaging=Rail/Tube, Power Dissipation=200mW, Pricing 1="1=0,62000, 10=0,44500, 100=0,29090, 500=0,20908, 1000=0,16362, 2500=0,14998, 5000=0,13635, 10000=0,12726, 25000=0,12272 (USD)", Radiation Hardening=No, REACH SVHC="No SVHC", Rise Time=18000ns, RoHS=Yes, Stock 1=19011, Supplier 1=Digi-Key
IC2: "MOSFET DRVR 1.5A 2-OUT Lo Side Inv 8-Pin SOIC N T/R", Manufacturer=Microchip, Category="Gate Drivers", ComponentLink1Description=https://datasheet.ciiva.com/1951/filehandler-aspxddocname-en026002-1951430.pdf?src-supplier=Digi-Key, ComponentLink1URL=https://datasheet.ciiva.com/1951/filehandler-aspxddocname-en026002-1951430.pdf?src-supplier=Digi-Key, ComponentLink2Description=https://datasheet.ciiva.com/16293/21422e-16293354.pdf?src-supplier=Future+Electronics, ComponentLink2URL=https://datasheet.ciiva.com/16293/21422e-16293354.pdf?src-supplier=Future+Electronics, ComponentLink3Description=https://datasheet.ciiva.com/17236/21423f-17236125.pdf?src-supplier=Avnet+Europe, ComponentLink3URL=https://datasheet.ciiva.com/17236/21423f-17236125.pdf?src-supplier=Avnet+Europe, ComponentLink4Description=https://datasheet.ciiva.com/8199/21423f-8199823.pdf?src-supplier=Avnet, ComponentLink4URL=https://datasheet.ciiva.com/8199/21423f-8199823.pdf?src-supplier=Avnet, Manufacturer Part Number=TC4426AEOA713, Pricing 1="1=1,32000, 25=1,10000, 100=1,00000 (USD)", RoHS=Yes, Stock 1=3145, Supplier 1=Digi-Key
J1: library part "CONN HEADER R_A 2POS 2.54MM", "Conn Wire to Board HDR 2 POS 2.54mm Solder RA Thru-Hole Bag", Color=White, Contact Resistance=10mR, Current Rating=4A, Flammability Rating="UL94 V-0", Manufacturer 1=Molex, Manufacturer Part Number 1=22-05-3021, Max Operating Temperature=75°C, Max Voltage Rating (AC)=250V, Min Operating Temperature=0°C, Package Quantity=3000, Supplier Part Number 1=900-0022053021-ND, Approvals=UL,CSA, ComponentLink1Description=https://datasheet.ciiva.com/30078/51220022053021-pcb-headers-30078128.pdf?src-supplier=Onlinecomponents.com, ComponentLink1URL=https://datasheet.ciiva.com/30078/51220022053021-pcb-headers-30078128.pdf?src-supplier=Onlinecomponents.com, ComponentLink2Description=https://datasheet.ciiva.com/15217/getdatasheetpartid-149585-15217569.pdf?src-supplier=Verical, ComponentLink2URL=https://datasheet.ciiva.com/15217/getdatasheetpartid-149585-15217569.pdf?src-supplier=Verical, ComponentLink3Description=https://datasheet.ciiva.com/11746/0900766b80d8f337-11746227.pdf?src-supplier=RSComponents, ComponentLink3URL=https://datasheet.ciiva.com/11746/0900766b80d8f337-11746227.pdf?src-supplier=RSComponents, ComponentLink4Description=https://datasheet.ciiva.com/19461/1965824-19461009.pdf?src-supplier=Jameco, ComponentLink4URL=https://datasheet.ciiva.com/19461/1965824-19461009.pdf?src-supplier=Jameco, ComponentLink5Description=https://datasheet.ciiva.com/5158/0022053021-pcb-headers-158630-5158265.pdf?src-supplier=Mouser, ComponentLink5URL=https://datasheet.ciiva.com/5158/0022053021-pcb-headers-158630-5158265.pdf?src-supplier=Mouser, ComponentLink6Description=https://datasheet.ciiva.com/19460/233437-19460906.pdf?src-supplier=Jameco, ComponentLink6URL=https://datasheet.ciiva.com/19460/233437-19460906.pdf?src-supplier=Jameco, ComponentLink7Description=https://datasheet.ciiva.com/7920/1631484-7920683.pdf?src-supplier=Element14, ComponentLink7URL=https://datasheet.ciiva.com/7920/1631484-7920683.pdf?src-supplier=Element14, ComponentLink8Description=https://datasheet.ciiva.com/16725/0022053021-pcb-headers-16725597.pdf?src-supplier=Avnet+Europe, ComponentLink8URL=https://datasheet.ciiva.com/16725/0022053021-pcb-headers-16725597.pdf?src-supplier=Avnet+Europe, ComponentLink9Description=https://datasheet.ciiva.com/9468/0022053021-pcb-headers-9468406.pdf?src-supplier=Avnet, ComponentLink9URL=https://datasheet.ciiva.com/9468/0022053021-pcb-headers-9468406.pdf?src-supplier=Avnet, Contact Material=Brass, Contact Plating=Tin,Copper, Depth=12.83mm, Gender=Male, Glow Wire Compliant=Non-compliant, Halogen Free="Low Halogen", Height=6.35mm, Housing Color=White, Housing Material=Nylon, Lead Free="Lead Free", Length=5.08mm, Max Current Rating=4A, Mount="Through Hole", Number of Circuits=2, Number of Contacts=2, Number of Positions=2, Number of Rows=1, Orientation="Right Angle", Packaging=Bulk, Pitch=2.54mm, Pricing 1="1=0,34000, 10=0,31700, 100=0,22200, 500=0,19026, 1000=0,15855, 5000=0,13590, 10000=0,12684 (USD)", Radiation Hardening=No, REACH SVHC=Unknown, RoHS=Yes, Stock 1=15372, Supplier 1=Digi-Key, Termination="Through Hole", Voltage Rating=250V
L1: "FIXED IND 47UH 2.71A 74 MOHM SMD", Case/Package=Nonstandard, Current Rating=2.71A, DC Resistance (DCR)=74mR, Inductance=47uH, Inductance Tolerance=20%, Manufacturer="Eaton Cooper", Manufacturer Part Number=DR125-470-R, Max Operating Temperature=125°C, Min Operating Temperature=-40°C, Saturation Current=3.24A, Self Resonant Frequency=100kHz, Supplier Part Number 1=513-1128-1-ND, Category="Fixed Inductors", ComponentLink1Description=https://datasheet.ciiva.com/14667/0900766b8116a153-14667792.pdf?src-supplier=RSComponents, ComponentLink1URL=https://datasheet.ciiva.com/14667/0900766b8116a153-14667792.pdf?src-supplier=RSComponents, ComponentLink2Description=https://datasheet.ciiva.com/26858/getdatasheetpartid-246997-26858394.pdf?src-supplier=Verical, ComponentLink2URL=https://datasheet.ciiva.com/26858/getdatasheetpartid-246997-26858394.pdf?src-supplier=Verical, ComponentLink3Description=https://datasheet.ciiva.com/16941/70037876-16941158.pdf?src-supplier=Allied+Electronics, ComponentLink3URL=https://datasheet.ciiva.com/16941/70037876-16941158.pdf?src-supplier=Allied+Electronics, ComponentLink4Description=https://datasheet.ciiva.com/30119/43bus-elx-ds-4315-dr-ser-30119639.pdf?src-supplier=Onlinecomponents.com, ComponentLink4URL=https://datasheet.ciiva.com/30119/43bus-elx-ds-4315-dr-ser-30119639.pdf?src-supplier=Onlinecomponents.com, ComponentLink5Description=https://datasheet.ciiva.com/27053/1771683-27053547.pdf?src-supplier=Jameco, ComponentLink5URL=https://datasheet.ciiva.com/27053/1771683-27053547.pdf?src-supplier=Jameco, Composition=Wirewound, Core Material=Ferrite, DC Current=2.71A, Depth=12.5mm, Height=6mm, Height - Seated (Max)=0.236inch, Length=12.5mm, Max DC Current=2.71A, Military Standard=Not, Mount="Surface Mount", Number of Pins=2, Packaging="Tape and Reel", Pricing 1="1=1,54000, 10=1,43200, 100=1,03530 (USD)", Radiation Hardening=No, REACH SVHC="No SVHC", RMS Current (Irms)=2.71A, RoHS=Yes, Shielding=Shielded, Stock 1=13528, Supplier 1=Digi-Key, Termination=SMD/SMT, Test Frequency=100kHz, Tolerance=20%, Weight=0.144oz, Width=12.5mm
Q1: "MOSFET, N, 400V, 10A, TO-220; Transistor Polarity:N Channel; Continuous Drain Current Id:10A; Drain Source Voltage Vds:400V; On Resistance Rds(on):550mohm; Rds(on) Test Voltage Vgs:10V; Threshold Voltage Vgs:4V; Power Dissipation ;RoHS Compliant: Yes", Case/Package=TO-220AB, Continuous Drain Current (ID)=10A, Drain to Source Breakdown Voltage=400V, Drain to Source Resistance=550mR, Gate to Source Voltage (Vgs)=30V, Input Capacitance=1.03nF, Manufacturer=Vishay, Max Operating Temperature=150°C, Max Power Dissipation=125W, Min Operating Temperature=-55°C, Package Quantity=50, Threshold Voltage=4V, Category=MOSFETs, ComponentLink1Description=https://datasheet.ciiva.com/15137/getdatasheetpartid-70588-15137354.pdf?src-supplier=Verical, ComponentLink1URL=https://datasheet.ciiva.com/15137/getdatasheetpartid-70588-15137354.pdf?src-supplier=Verical, ComponentLink2Description=https://datasheet.ciiva.com/4440/91051-69767-4440212.pdf?src-supplier=Mouser, ComponentLink2URL=https://datasheet.ciiva.com/4440/91051-69767-4440212.pdf?src-supplier=Mouser, ComponentLink3Description=https://datasheet.ciiva.com/22754/1349041-22754456.pdf?src-supplier=Farnell, ComponentLink3URL=https://datasheet.ciiva.com/22754/1349041-22754456.pdf?src-supplier=Farnell, ComponentLink4Description=https://datasheet.ciiva.com/16990/0900766b80791156-16990490.pdf?src-supplier=Allied+Electronics, ComponentLink4URL=https://datasheet.ciiva.com/16990/0900766b80791156-16990490.pdf?src-supplier=Allied+Electronics, ComponentLink5Description=https://datasheet.ciiva.com/6385/91051-6385820.pdf?src-supplier=Digi-Key, ComponentLink5URL=https://datasheet.ciiva.com/6385/91051-6385820.pdf?src-supplier=Digi-Key, ComponentLink6Description=https://datasheet.ciiva.com/26146/91051-26146764.pdf?src-supplier=Avnet+Europe, ComponentLink6URL=https://datasheet.ciiva.com/26146/91051-26146764.pdf?src-supplier=Avnet+Europe, ComponentLink7Description=https://datasheet.ciiva.com/11158/91051-11158317.pdf?src-supplier=Avnet, ComponentLink7URL=https://datasheet.ciiva.com/11158/91051-11158317.pdf?src-supplier=Avnet, ComponentLink8Description=https://datasheet.ciiva.com/8025/1916224-8025495.pdf?src-supplier=Element14, ComponentLink8URL=https://datasheet.ciiva.com/8025/1916224-8025495.pdf?src-supplier=Element14, ComponentLink9Description=https://datasheet.ciiva.com/7788/1349041-7788925.pdf?src-supplier=Element14, ComponentLink9URL=https://datasheet.ciiva.com/7788/1349041-7788925.pdf?src-supplier=Element14, Current Rating=10A, Drain to Source Voltage (Vdss)=400V, Element Configuration=Single, Fall Time=22ns, Height=9.01mm, Lead Free="Lead Free", Length=10.41mm, Manufacturer Part Number=IRF740APBF, Mount="Through Hole", Nominal Vgs=4V, Number of Channels=1, Number of Elements=1, Number of Pins=3, On-State Resistance=550mR, Packaging=Rail/Tube, Power Dissipation=125W, Pricing 1="1=2,39000, 10=2,14900, 25=2,02760, 100=1,58160, 250=1,54108, 500=1,33832, 1000=1,13554, 2500=1,11932, 5000=1,03821 (USD)", Radiation Hardening=No, Rds On Max=550mR, REACH SVHC="No SVHC", Rise Time=35ns, RoHS=Yes, Stock 1=877, Supplier 1=Digi-Key, Turn-Off Delay Time=24ns, Turn-On Delay Time=10ns, Voltage Rating (DC)=400V, Weight=0.211644oz, Width=4.7mm
Q2 Q3: "200V Single N-Channel HEXFET Power MOSFET Switch in a TO-262 package", Case/Package=TO-262, Drain to Source Resistance=22mR, Drain to Source Voltage (Vdss)=200V, Gate to Source Voltage (Vgs)=20V, Manufacturer=Infineon, Max Operating Temperature=175°C, Min Operating Temperature=-55°C, Power Dissipation=375W, Category=MOSFETs, ComponentLink1Description=https://www.alliedelec.com/m/d/905bffad1195b62bb948415acb3fbc50.pdf?src-supplier=Allied+Electronics, ComponentLink1URL=https://www.alliedelec.com/m/d/905bffad1195b62bb948415acb3fbc50.pdf?src-supplier=Allied+Electronics, Halogen Free="Halogen Free", Height=0.38inch, Lead Free="Lead Free", Length=0.42inch, Manufacturer Part Number=IRFSL4127PBF, Max Dual Supply Voltage=200V, Mount="Through Hole", Number of Pins=3, Pricing 1="1=4,88000, 10=4,15000, 100=3,32000, 500=2,95000, 1000=2,63000, 2000=2,63000 (USD)", RoHS=Yes, Stock 1=44, Supplier 1=Mouser, Turn-Off Delay Time=56ns, Turn-On Delay Time=17ns, Width=0.19inch
R1: "TE CONNECTIVITY         RLP73K3AR15JTE             SMD Current Sense Resistor, 0.15 ohm, 2512 [6432 Metric], 2 W,  5%, RL73 Series", Case Code (Imperial)=2512, Case Code (Metric)=6432, Manufacturer="TE Connectivity", Manufacturer Part Number=RLP73K3AR15JTE, Max Operating Temperature=155°C, Max Power Dissipation=2W, Min Operating Temperature=-55°C, Number of Resistors=1, Package Quantity=2000, Resistance=150mR, Supplier Part Number 1=A109895CT-ND, Temperature Coefficient=200ppm/°C, Tolerance=5%, Case/Package=2512, Category="Chip SMD Resistors", ComponentLink1Description=https://datasheet.ciiva.com/18601/eng-cd-2176058-ba-18601048.pdf?src-supplier=Digi-Key, ComponentLink1URL=https://datasheet.ciiva.com/18601/eng-cd-2176058-ba-18601048.pdf?src-supplier=Digi-Key, ComponentLink2Description=https://datasheet.ciiva.com/18601/eng-cd-2176058-ba-18601049.pdf?src-supplier=Digi-Key, ComponentLink2URL=https://datasheet.ciiva.com/18601/eng-cd-2176058-ba-18601049.pdf?src-supplier=Digi-Key, ComponentLink3Description=https://datasheet.ciiva.com/7823/1610602-7823514.pdf?src-supplier=Element14, ComponentLink3URL=https://datasheet.ciiva.com/7823/1610602-7823514.pdf?src-supplier=Element14, ComponentLink4Description=https://datasheet.ciiva.com/18601/eng-cd-2176058-ba-18601050.pdf?src-supplier=Digi-Key, ComponentLink4URL=https://datasheet.ciiva.com/18601/eng-cd-2176058-ba-18601050.pdf?src-supplier=Digi-Key, Composition="Thick Film", ELV=Compliant, Height=0.033inch, Length=0.25inch, Mount="Surface Mount", Number of Terminations=2, Packaging="Tape and Reel", Power Rating=2W, Pricing 1="1=0,63000, 10=0,46300, 25=0,37600, 50=0,32700, 100=0,26980, 250=0,23440, 500=0,19078, 1000=0,15132 (USD)", REACH SVHC="No SVHC", RoHS=Yes, Stock 1=4167, Supplier 1=Digi-Key, Termination=Solder, Width=0.124inch
R2: "RES SMD 47 OHM 5% 1/8W 0805", Case Code (Imperial)=0805, Case Code (Metric)=2012, Manufacturer="Stackpole Electronics", Manufacturer Part Number=RMCF0805JT47R0, Max Operating Temperature=155°C, Max Power Dissipation=125mW, Min Operating Temperature=-55°C, Resistance=47R, Temperature Coefficient=100ppm/°C, Tolerance=5%, Case/Package=0805, Category="Chip SMD Resistors", ComponentLink1Description=https://www.seielect.com/catalog/SEI-RMCF_RMCP.pdf?src-supplier=Avnet, ComponentLink1URL=https://www.seielect.com/catalog/SEI-RMCF_RMCP.pdf?src-supplier=Avnet, ComponentLink2Description=http://www.seielect.com/catalog/sei-rmc.pdf?src-supplier=Future+Electronics, ComponentLink2URL=http://www.seielect.com/catalog/sei-rmc.pdf?src-supplier=Future+Electronics, ComponentLink3Description=https://www.seielect.com/Catalog/SEI-RMCF_RMCP.pdf?src-supplier=Digi-Key, ComponentLink3URL=https://www.seielect.com/Catalog/SEI-RMCF_RMCP.pdf?src-supplier=Digi-Key, ComponentLink4Description=https://www.seielect.com/catalog/SEI-Packaging.pdf?src-supplier=Digi-Key, ComponentLink4URL=https://www.seielect.com/catalog/SEI-Packaging.pdf?src-supplier=Digi-Key, ComponentLink5Description=http://components.arrow.com/part/dataview/50576472S7171816N1174?src-supplier=Arrow, ComponentLink5URL=http://components.arrow.com/part/dataview/50576472S7171816N1174?src-supplier=Arrow, Composition="Thick Film", Contact Plating=Tin,Matte, Features="Automotive AEC-Q200", Height=0.026inch, Lead Free="Lead Free", Length=0.079inch, Mount="Surface Mount", Number of Terminations=2, Packaging="Tape and Reel", Power Rating=125mW, Pricing 1="1=0,10000, 10=0,01900, 100=0,00780, 1000=0,00350, 2500=0,00304 (USD)", Radiation Hardening=No, RoHS=Yes, Stock 1=252315, Supplier 1=Digi-Key, Width=0.049inch
R3 R5 R6 R13 R14 R17: library part Res_1k_0805, "RES SMD 0805 1k 1/8W", Supplier Part Number 1=311-1.00KCRDKR-ND, Supplier 1=Digi-Key, Supplier 2=Mouser, Supplier Part Number 2=603-RC0805FR-071KL
R4: library part "RES 3.3K OHM 2512", "RES SMD 3.3K OHM 1% 2W 2512", Case Code (Imperial)=2512, Case Code (Metric)=6432, Manufacturer 1="Stackpole Electronics", Manufacturer Part Number 1=RHC2512FT3K30, Max Operating Temperature=155°C, Max Power Dissipation=2W, Min Operating Temperature=-55°C, Resistance=3.3kR, Supplier Part Number 1=RHC2512FT3K30CT-ND, Temperature Coefficient=100ppm/°C, Tolerance=1%, Case/Package=2512, ComponentLink1Description=https://www.seielect.com/Catalog/SEI-rhc.pdf?src-supplier=Avnet, ComponentLink1URL=https://www.seielect.com/Catalog/SEI-rhc.pdf?src-supplier=Avnet, ComponentLink2Description=https://www.seielect.com/Catalog/SEI-rhc.pdf?src-supplier=Digi-Key, ComponentLink2URL=https://www.seielect.com/Catalog/SEI-rhc.pdf?src-supplier=Digi-Key, Composition="Thick Film", Contact Plating=Tin,Matte, Features="Moisture Resistant", Height=0.028inch, Lead Free="Lead Free", Length=0.248inch, Mount="Surface Mount", Number of Terminations=2, Packaging="Tape and Reel", Power Rating=2W, Pricing 1="1=0,84000, 10=0,72600, 100=0,50600, 1000=0,29920 (USD)", Radiation Hardening=No, RoHS=Yes, Stock 1=1030, Supplier 1=Digi-Key, Width=0.126inch
R7: library part Res_150k_0805, "RES SMD 150K 0.125W 0805", Supplier Part Number 1=P150KCCT-ND, Supplier 1=Digi-Key